# EAGLE board CT_schematic (EAGLE 7.6.0)

Size 100 x 80 mm. Coordinates in mm from the lower left corner, seen from the top.
Outline: 0,0 100,0 100,80 0,80 0,0
Copper layers (1*16): Top 0.035mm / dielectric 1.5mm / Bottom 0.035mm
Design rules "default": minimum track width 10mil, minimum drill 24mil, track to track 8mil, track to pad 8mil, pad to pad 8mil, via to via 8mil, smd to smd 8mil, copper to edge 40mil, drill to drill 8mil, minimum pad ring 10mil, minimum via ring 8mil, stop-mask expansion 4mil, vias tented up to drill 0mil, thermal gap 10mil

## Footprints (pad centres in the part's own frame; a part is rotated, then mirrored left to right if it is on the bottom)
C0603 = smd 0.8 x 0.8: 1 -0.762,0; 2 0.762,0
C0805 = smd 1.2 x 1.3: 1 -1.016,0; 2 1.016,0
C0402 = smd 0.5 x 0.5: 1 -0.508,0; 2 0.508,0
C1210 = smd 1.2 x 2.5: 1 -1.524,0; 2 1.524,0
R0603 = smd 0.8 x 0.8: 1 -0.762,0; 2 0.762,0
EXV-9H = smd 3.505 x 1.676: 1 -2.857,0; 2 2.857,0
L0603 = smd 0.8 x 0.8: 1 -0.762,0; 2 0.762,0
L1210 = smd 1.2 x 2.5: 1 -1.524,0; 2 1.524,0
IND25X25CZ = smd 2.489 x 3.429: 1 -2.718,0; 2 2.718,0
PJ-037B_PACKAGE = drill 3.7 square: 1 12,0 | drill 3.2 square: 2 6,0
LFBGA144 = smd 0.52 x 0.52: A1 -4.4,4.4; A2 -3.6,4.4; A3 -2.8,4.4; A4 -2,4.4; A5 -1.2,4.4; A6 -0.4,4.4; A7 0.4,4.4; A8 1.2,4.4; A9 2,4.4; A10 2.8,4.4; A11 3.6,4.4; A12 4.4,4.4; B1 -4.4,3.6; B2 -3.6,3.6; B3 -2.8,3.6; B4 -2,3.6; B5 -1.2,3.6; B6 -0.4,3.6; B7 0.4,3.6; B8 1.2,3.6; B9 2,3.6; B10 2.8,3.6; B11 3.6,3.6; B12 4.4,3.6; C1 -4.4,2.8; C2 -3.6,2.8; C3 -2.8,2.8; C4 -2,2.8; C5 -1.2,2.8; C6 -0.4,2.8; C7 0.4,2.8; C8 1.2,2.8; C9 2,2.8; C10 2.8,2.8; C11 3.6,2.8; C12 4.4,2.8; D1 -4.4,2; D2 -3.6,2; D3 -2.8,2; D4 -2,2; D5 -1.2,2; D6 -0.4,2; D7 0.4,2; D8 1.2,2; D9 2,2; D10 2.8,2; D11 3.6,2; D12 4.4,2; E1 -4.4,1.2; E2 -3.6,1.2; E3 -2.8,1.2; E4 -2,1.2; E5 -1.2,1.2; E6 -0.4,1.2; E7 0.4,1.2; E8 1.2,1.2; E9 2,1.2; E10 2.8,1.2; E11 3.6,1.2; E12 4.4,1.2; F1 -4.4,0.4; F2 -3.6,0.4; F3 -2.8,0.4; F4 -2,0.4; F5 -1.2,0.4; F6 -0.4,0.4; F7 0.4,0.4; F8 1.2,0.4; F9 2,0.4; F10 2.8,0.4; F11 3.6,0.4; F12 4.4,0.4; G1 -4.4,-0.4; G2 -3.6,-0.4; G3 -2.8,-0.4; G4 -2,-0.4; G5 -1.2,-0.4; G6 -0.4,-0.4; G7 0.4,-0.4; G8 1.2,-0.4; G9 2,-0.4; G10 2.8,-0.4; G11 3.6,-0.4; G12 4.4,-0.4; H1 -4.4,-1.2; H2 -3.6,-1.2; H3 -2.8,-1.2; H4 -2,-1.2; H5 -1.2,-1.2; H6 -0.4,-1.2; H7 0.4,-1.2; H8 1.2,-1.2; H9 2,-1.2; H10 2.8,-1.2; H11 3.6,-1.2; H12 4.4,-1.2; J1 -4.4,-2; J2 -3.6,-2; J3 -2.8,-2; J4 -2,-2; J5 -1.2,-2; J6 -0.4,-2; J7 0.4,-2; J8 1.2,-2; J9 2,-2; J10 2.8,-2; J11 3.6,-2; J12 4.4,-2; K1 -4.4,-2.8; K2 -3.6,-2.8; K3 -2.8,-2.8; K4 -2,-2.8; K5 -1.2,-2.8; K6 -0.4,-2.8; K7 0.4,-2.8; K8 1.2,-2.8; K9 2,-2.8; K10 2.8,-2.8; K11 3.6,-2.8; K12 4.4,-2.8; L1 -4.4,-3.6; L2 -3.6,-3.6; L3 -2.8,-3.6; L4 -2,-3.6; L5 -1.2,-3.6; L6 -0.4,-3.6; L7 0.4,-3.6; L8 1.2,-3.6; L9 2,-3.6; L10 2.8,-3.6; L11 3.6,-3.6; L12 4.4,-3.6; M1 -4.4,-4.4; M2 -3.6,-4.4; M3 -2.8,-4.4; M4 -2,-4.4; M5 -1.2,-4.4; M6 -0.4,-4.4; M7 0.4,-4.4; M8 1.2,-4.4; M9 2,-4.4; M10 2.8,-4.4; M11 3.6,-4.4; M12 4.4,-4.4
SSOP-20 = smd 1.651 x 0.432: 1 -3.48,2.925; 2 -3.48,2.275; 3 -3.48,1.625; 4 -3.48,0.975; 5 -3.48,0.325; 6 -3.48,-0.325; 7 -3.48,-0.975; 8 -3.48,-1.625; 9 -3.48,-2.275; 10 -3.48,-2.925; 11 3.48,-2.925; 12 3.48,-2.275; 13 3.48,-1.625; 14 3.48,-0.975; 15 3.48,-0.325; 16 3.48,0.325; 17 3.48,0.975; 18 3.48,1.625; 19 3.48,2.275; 20 3.48,2.925
HTSS-105-01-G-D = drill 1 pad 1.8 square: 1 0,0 | drill 1 pad 1.8: 2 0,2.54; 3 2.54,0; 4 2.54,2.54; 5 5.08,0; 6 5.08,2.54; 7 7.62,0; 8 7.62,2.54; 9 10.16,0; 10 10.16,2.54
VFBGA-63 = smd 0.4 x 0.4: A1 -3.6,4.4; A2 -2.8,4.4; A9 2.8,4.4; A10 3.6,4.4; B1 -3.6,3.6; B9 2.8,3.6; B10 3.6,3.6; C3 -2,2.8; C4 -1.2,2.8; C5 -0.4,2.8; C6 0.4,2.8; C7 1.2,2.8; C8 2,2.8; D3 -2,2; D4 -1.2,2; D5 -0.4,2; D6 0.4,2; D7 1.2,2; D8 2,2; E3 -2,1.2; E4 -1.2,1.2; E5 -0.4,1.2; E6 0.4,1.2; E7 1.2,1.2; E8 2,1.2; F3 -2,0.4; F4 -1.2,0.4; F5 -0.4,0.4; F6 0.4,0.4; F7 1.2,0.4; F8 2,0.4; G3 -2,-0.4; G4 -1.2,-0.4; G5 -0.4,-0.4; G6 0.4,-0.4; G7 1.2,-0.4; G8 2,-0.4; H3 -2,-1.2; H4 -1.2,-1.2; H5 -0.4,-1.2; H6 0.4,-1.2; H7 1.2,-1.2; H8 2,-1.2; J3 -2,-2; J4 -1.2,-2; J5 -0.4,-2; J6 0.4,-2; J7 1.2,-2; J8 2,-2; K3 -2,-2.8; K4 -1.2,-2.8; K5 -0.4,-2.8; K6 0.4,-2.8; K7 1.2,-2.8; K8 2,-2.8; L1 -3.6,-3.6; L2 -2.8,-3.6; L9 2.8,-3.6; L10 3.6,-3.6; M1 -3.6,-4.4; M2 -2.8,-4.4; M9 2.8,-4.4; M10 3.6,-4.4
SON-8 = smd 0.35 x 0.85: 1 -0.975,-1.475; 2 -0.325,-1.475; 3 0.325,-1.475; 4 0.975,-1.475; 5 0.975,1.475; 6 0.325,1.475; 7 -0.325,1.475; 8 -0.975,1.475 | smd 2.4 x 1.65: PAD 0,0
QFN-28 = smd 0.813 x 0.305: 1 -2.451,1.5; 2 -2.451,1; 3 -2.451,0.5; 4 -2.451,0; 5 -2.451,-0.5; 6 -2.451,-1; 7 -2.451,-1.5; 15 2.451,-1.5; 16 2.451,-1; 17 2.451,-0.5; 18 2.451,0; 19 2.451,0.5; 20 2.451,1; 21 2.451,1.5 | smd 0.305 x 0.813: 8 -1.5,-2.451; 9 -1,-2.451; 10 -0.5,-2.451; 11 0,-2.451; 12 0.5,-2.451; 13 1,-2.451; 14 1.5,-2.451; 22 1.5,2.451; 23 1,2.451; 24 0.5,2.451; 25 0,2.451; 26 -0.5,2.451; 27 -1,2.451; 28 -1.5,2.451 | smd 3.607 x 3.607: 29 0,0
SJ-43515TS-SMT-TR = smd 2.2 x 3: 1 0.6,-7.4; 4 3.4,-7.4 | smd 3 x 3: 2 12.8,-7.4; 5 17,-3 | smd 2 x 3: 3 5.3,0; 6 2.5,0 | drill 1.8: P$7 4.5,-3.69; P$8 11.54,-3.69
ABS07-32.768KHZ-7-T = smd 1.1 x 2.4: 1 -2.5,0; 2 0,0
ABLS-12.288MHZ-B4-T = smd 5.6 x 2.8: 1 -3.81,0; 2 5.69,0
ASEK = smd 1.4 x 1: 1 -1.1,-0.8; 2 1.1,-0.8; 3 1.1,0.8; 4 -1.1,0.8
ASFL1 = smd 1.7 x 1.5: 1 -1.27,-1.1; 2 1.27,-1.1; 3 1.27,1.1; 4 -1.27,1.1
IR3899MTR1PBF = smd 0.25 x 0.75: 1 0,0; 2 0.5,0; 3 1,0; 4 1.5,0; 5 2,0; 6 2.5,0; 7 3,0 | smd 0.75 x 0.25: 8 3.425,0.78; 9 3.425,1.28; 10 3.425,1.78; 14 -0.425,1.78; 15 -0.425,1.28; 16 -0.425,0.78 | smd 0.3 x 1.95: 11 3.22,3.63 | smd 1.62 x 2.42: 12 1.786,3.8 | smd 1 x 1.95: 13 0.117,3.63 | smd 2.19 x 1.25: 17 1.51,1.26
SON-6 = smd 0.55 x 0.3: 1 -0.355,0.5 | smd 0.52 x 0.3: 2 -0.37,0; 3 -0.37,-0.5; 4 0.37,-0.5; 5 0.37,0; 6 0.37,0.5
SW_4-1437565-2 = smd 1.4 x 2.1: 1 -2.23,4.55; 2 -2.23,-4.55; 3 2.23,4.55; 4 2.23,-4.55
LGM67K-G1J2-24-Z = smd 0.8 x 1.4: A -2,0; C 0,0
NC7SZ125M5X = smd 1.3 x 0.7: 1 -1.3,0.95; 2 -1.3,0; 3 -1.3,-0.95; 4 1.3,-0.95; 5 1.3,0.95

## Placement (x,y rotation side)
C1  1e-06  [C0603]  -22.86,77.47 0 top  (outside the outline)
C2  1e-07  [C0603]  -26.67,77.47 0 top  (outside the outline)
C3  1e-07  [C0603]  -30.48,77.47 0 top  (outside the outline)
C4  1e-07  [C0603]  -34.29,77.47 0 top  (outside the outline)
C5  1e-07  [C0603]  -38.1,77.47 0 top  (outside the outline)
C6  1e-07  [C0603]  -41.91,77.47 0 top  (outside the outline)
C7  1e-07  [C0603]  -45.72,77.47 0 top  (outside the outline)
C8  1e-07  [C0603]  -49.53,77.47 0 top  (outside the outline)
C9  1e-07  [C0603]  -53.34,77.47 0 top  (outside the outline)
C10  1e-07  [C0603]  -57.15,77.47 0 top  (outside the outline)
C11  1e-07  [C0603]  -60.96,77.47 0 top  (outside the outline)
C12  1e-07  [C0603]  -64.77,77.47 0 top  (outside the outline)
C13  1e-07  [C0603]  -68.58,77.47 0 top  (outside the outline)
C14  4.7e-06  [C0603]  -74.93,72.39 0 top  (outside the outline)
C15  1e-08  [C0603]  -72.39,77.47 0 top  (outside the outline)
C16  1e-08  [C0603]  -76.2,77.47 0 top  (outside the outline)
C17  1e-06  [C0603]  -80.01,77.47 0 top  (outside the outline)
C18  1e-06  [C0603]  -15.24,82.55 0 top  (outside the outline)
C19  1e-06  [C0603]  -19.05,82.55 0 top  (outside the outline)
C20  1e-06  [C0603]  -22.86,82.55 0 top  (outside the outline)
C21  4.7e-06  [C0805]  -50.8,60.96 0 top  (outside the outline)
C22  1e-07  [C0402]  -73.66,82.55 0 top  (outside the outline)
C23  1e-07  [C0402]  -77.47,82.55 0 top  (outside the outline)
C24  1e-07  [C0402]  -81.28,82.55 0 top  (outside the outline)
C25  1e-07  [C0402]  -15.24,87.63 0 top  (outside the outline)
C26  2.2e-06  [C0603]  -78.74,72.39 0 top  (outside the outline)
C27  1e-07  [C0402]  -19.05,87.63 0 top  (outside the outline)
C28  2.2e-05  [C1210]  -20.32,62.23 0 top  (outside the outline)
C29  2.2e-05  [C1210]  -26.67,62.23 0 top  (outside the outline)
C30  1e-09  [C0402]  -22.86,87.63 0 top  (outside the outline)
C31  1e-09  [C0402]  -26.67,87.63 0 top  (outside the outline)
C32  1e-07  [C0402]  -30.48,87.63 0 top  (outside the outline)
C33  1e-07  [C0402]  -34.29,87.63 0 top  (outside the outline)
C34  1e-07  [C0402]  -38.1,87.63 0 top  (outside the outline)
C35  1e-07  [C0402]  -41.91,87.63 0 top  (outside the outline)
C36  1e-07  [C0402]  -45.72,87.63 0 top  (outside the outline)
C37  1e-05  [C0805]  -55.88,60.96 0 top  (outside the outline)
C38  1e-05  [C0805]  -60.96,60.96 0 top  (outside the outline)
C39  1e-05  [C0805]  -66.04,60.96 0 top  (outside the outline)
C40  1e-05  [C0805]  -71.12,60.96 0 top  (outside the outline)
C41  1e-05  [C0805]  -76.2,60.96 0 top  (outside the outline)
C42  2.2e-11  [C0402]  -66.04,82.55 0 top  (outside the outline)
C43  2.2e-11  [C0402]  -69.85,82.55 0 top  (outside the outline)
C44  1e-08  [C0402]  -49.53,87.63 0 top  (outside the outline)
C45  1e-08  [C0402]  -53.34,87.63 0 top  (outside the outline)
C46  0.0001  [C1210]  -33.02,62.23 0 top  (outside the outline)
C47  2.2e-06  [C0603]  -15.24,77.47 0 top  (outside the outline)
C48  1e-07  [C0402]  -57.15,87.63 0 top  (outside the outline)
C49  1e-07  [C0402]  -60.96,87.63 0 top  (outside the outline)
C50  7.8444498006919e-09  [R0603]  -20.32,67.31 0 top  (outside the outline)
C51  2.7e-07  [C0603]  -19.05,77.47 0 top  (outside the outline)
C54  1e-07  [C0402]  -64.77,87.63 0 top  (outside the outline)
C55  0.0001  [EXV-9H]  -55.88,45.72 0 top  (outside the outline)
C56  0.0001  [EXV-9H]  -67.31,45.72 0 top  (outside the outline)
C57  1e-08  [C0402]  -68.58,87.63 0 top  (outside the outline)
F1  240.0  [L0603]  -26.67,82.55 0 top  (outside the outline)
I1  1.5e-05  [L1210]  -39.37,62.23 0 top  (outside the outline)
I2  6.8e-07  [IND25X25CZ]  -36.83,54.61 0 top  (outside the outline)
J1  PJ-037B  [PJ-037B_PACKAGE]  -55.88,21.59 0 top  (outside the outline)
R2  1000.0  [R0603]  -30.48,82.55 0 top  (outside the outline)
R4  4700.0  [R0603]  -34.29,82.55 0 top  (outside the outline)
R5  2200.0  [R0603]  -38.1,82.55 0 top  (outside the outline)
R6  2200.0  [R0603]  -41.91,82.55 0 top  (outside the outline)
R7  10000.0  [R0603]  -73.66,67.31 0 top  (outside the outline)
R8  100000.0  [R0603]  -48.26,67.31 0 top  (outside the outline)
R9  100000.0  [R0603]  -53.34,67.31 0 top  (outside the outline)
R10  100000.0  [R0603]  -58.42,67.31 0 top  (outside the outline)
R11  10000.0  [R0603]  -78.74,67.31 0 top  (outside the outline)
R12  10000.0  [R0603]  -15.24,72.39 0 top  (outside the outline)
R13  10000.0  [R0603]  -20.32,72.39 0 top  (outside the outline)
R14  10000.0  [R0603]  -25.4,72.39 0 top  (outside the outline)
R15  10000.0  [R0603]  -30.48,72.39 0 top  (outside the outline)
R16  10000.0  [R0603]  -35.56,72.39 0 top  (outside the outline)
R17  47000.0  [R0603]  -40.64,72.39 0 top  (outside the outline)
R18  47000.0  [R0603]  -45.72,72.39 0 top  (outside the outline)
R19  47000.0  [R0603]  -50.8,72.39 0 top  (outside the outline)
R20  680.0  [R0603]  -45.72,82.55 0 top  (outside the outline)
R21  0.1  [R0603]  -49.53,82.55 0 top  (outside the outline)
R22  4030.2416170974  [R0603]  -27.94,67.31 0 top  (outside the outline)
R23  719.68600305311  [R0603]  -35.56,67.31 0 top  (outside the outline)
R24  64.984347826087  [R0603]  -43.18,67.31 0 top  (outside the outline)
R25  130.0  [R0603]  -53.34,82.55 0 top  (outside the outline)
R26  39000.0  [R0603]  -55.88,72.39 0 top  (outside the outline)
R27  49900.0  [R0603]  -60.96,72.39 0 top  (outside the outline)
R28  5600.0  [R0603]  -57.15,82.55 0 top  (outside the outline)
R29  10000.0  [R0603]  -66.04,72.39 0 top  (outside the outline)
R30  10000.0  [R0603]  -71.12,72.39 0 top  (outside the outline)
R31  9100.0  [R0603]  -60.96,82.55 0 top  (outside the outline)
R32  680000.0  [R0603]  -63.5,67.31 0 top  (outside the outline)
R33  120000.0  [R0603]  -68.58,67.31 0 top  (outside the outline)
U1  stm32f103zgh7  [LFBGA144]  -22.86,7.62 0 top  (outside the outline)
U2  MAX3218EAP+T  [SSOP-20]  -71.12,33.02 0 top  (outside the outline)
U3  HTSS-105-01-G-D  [HTSS-105-01-G-D]  -62.23,33.02 0 top  (outside the outline)
U4  mt29f4g08abadah4  [VFBGA-63]  -62.23,21.59 0 top  (outside the outline)
U5  PCF85063TP/1Z  [SON-8]  -15.24,60.96 0 top  (outside the outline)
U6  WM8731CLSEFL  [QFN-28]  -77.47,53.34 0 top  (outside the outline)
U7  SJ-43515TS-SMT-TR  [SJ-43515TS-SMT-TR]  -54.61,10.16 0 top  (outside the outline)
U8  SJ-43515TS-SMT-TR  [SJ-43515TS-SMT-TR]  -39.37,24.13 0 top  (outside the outline)
U9  ABS07-32.768KHZ-7-T  [ABS07-32.768KHZ-7-T]  -55.88,54.61 0 top  (outside the outline)
U10  ABLS-12.288MHZ-B4-T  [ABLS-12.288MHZ-B4-T]  -25.4,54.61 0 top  (outside the outline)
U11  ASEK-32.768KHz-ECST  [ASEK]  -46.99,45.72 0 top  (outside the outline)
U12  ASFL1-25MHZ-NCS  [ASFL1]  -26.67,45.72 0 top  (outside the outline)
U13  IR3899MTR1PBF  [IR3899MTR1PBF]  -44.45,31.75 0 top  (outside the outline)
U14  TPS3895ADRYR  [SON-6]  -71.12,86.36 0 top  (outside the outline)
U15  4-1437565-2  [SW_4-1437565-2]  -27.94,35.56 0 top  (outside the outline)
U16  Q65110A2395  [LGM67K-G1J2-24-Z]  -64.77,53.34 0 top  (outside the outline)
U17  nc7sz125m5x  [NC7SZ125M5X]  -44.45,60.96 0 top  (outside the outline)

## Library data of the parts
C1-C51 C54-C57 F1 I1 I2 J1 R2 R4-R33 U1-U17 = circuit_tree

## Nets
CLK_CRYSTAL_U5_1: U5.1 U9.1
CLK_CRYSTAL_U5_2: U5.2 U9.2
CLK_CRYSTAL_U6_1: C42.1 U6.1 U10.1
CLK_CRYSTAL_U6_2: C43.1 U6.2 U10.2
CLK_U1_B1: U1.B1 U11.3
CLK_U1_D1: U1.D1 U12.3
GND: C1.2 C2.2 C3.2 C4.2 C5.2 C6.2 C7.2 C8.2 C9.2 C10.2 C11.2 C12.2 C13.2 C14.2 C15.2 C16.2 C17.2 C18.2 C19.2 C20.2 C22.2 C23.2 C24.2 C25.2 C26.2 C27.2 C31.2 C32.2 C33.2 C34.2 C35.2 C36.2 C37.2 C38.2 C39.2 C40.2 C41.2 C42.2 C43.2 C44.2 C45.2 C47.2 C48.2 C49.2 C54.2 C55.2 C56.2 C57.2 J1.2 R2.2 R7.2 R17.2 R18.2 R19.2 R21.1 R21.2 R23.2 R26.2 R28.2 R31.2 R33.2 U1.D2 U1.E5 U1.E6 U1.E7 U1.G4 U1.G8 U1.G9 U1.G10 U1.H5 U1.H6 U1.H7 U1.J1 U1.K1 U2.5 U2.17 U2.20 U3.9 U4.C5 U4.F7 U4.K3 U4.K8 U5.4 U5.PAD U6.4 U6.15 U6.19 U6.25 U6.26 U6.29 U7.1 U8.1 U11.2 U12.2 U13.4 U13.11 U13.17 U14.2 U16.C U17.1 U17.3
NET_U1_B5: R6.1 U1.B5 U5.5
NET_U1_C5: R5.1 U1.C5 U5.6
NET_U1_D5: R7.1 U1.D5
NET_U1_F1: R4.1 U1.F1 U17.4
NET_U1_M1: C15.1 C16.1 C17.1 F1.1 U1.L1 U1.M1
NET_U1_M9: U16.A
NET_U1_M10: U15.3 U15.4
NET_U2_1: I1.1 U2.1
NET_U2_2: R8.1 U2.2
NET_U2_3: R9.1 U2.3
NET_U2_4: R10.1 U2.4
NET_U2_15: C20.1 U2.15
NET_U2_16: C21.2 U2.16
NET_U2_18: C21.1 U2.18
NET_U2_19: C19.1 U2.19
NET_U3_3: U2.12 U3.3
NET_U3_4: U2.11 U3.4
NET_U3_5: U2.14 U3.5
NET_U3_6: U2.13 U3.6
NET_U4_C3: R15.1 U4.C3
NET_U4_C8: R11.1 U4.C8
NET_U5_3: R16.1 U5.3
NET_U6_9: U6.9
NET_U6_20: C36.1 C41.1 U6.20
NET_U7_2: C29.1 R18.1 U7.2
NET_U7_5: C28.1 R17.1 U7.5
NET_U7_13: C28.2
NET_U7_14: C29.2
NET_U8_5: C30.1 C31.1 R19.1 R20.1 U8.5
NET_U8_21: R20.2
NET_U8_22: C30.2
NET_U13_1: C50.1 R22.1 R23.1 R24.1 R25.1 U13.1 U13.8
NET_U13_2: C49.1 U13.2
NET_U13_3: C50.2 C51.1 C51.2 U13.3
NET_U13_5: R26.1 U13.5
NET_U13_10: C47.1 U13.10
NET_U13_12: C46.1 I2.1 U13.12
NET_U13_13: U13.13
NET_U13_14: C46.2 U13.14
NET_U13_15: R27.1 R28.1 U13.15
NET_U13_ATNET_3: I2.2 R22.2
NET_U13_ATNET_4: C51.2 R24.2
NET_U13_ATNET_5: R25.2
NET_U14_1: R30.1 R31.1 U14.1
NET_U14_3: R32.2 R33.1 U14.3
NET_U14_4: R29.1 U14.4 U17.2
NET_U15_1: R2.1 U15.1 U15.2
PROC_FSMC_D0: U1.K11 U4.H4
PROC_FSMC_D1: U1.K12 U4.J4
PROC_FSMC_D2: U1.E10 U4.K4
PROC_FSMC_D3: U1.D10 U4.K5
PROC_FSMC_D4: U1.M7 U4.K6
PROC_FSMC_D5: U1.L7 U4.J7
PROC_FSMC_D6: U1.K7 U4.K7
PROC_FSMC_D7: U1.J7 U4.J8
PROC_FSMC_NCE2: R12.1 U1.A9 U4.C6
PROC_FSMC_NOE: R14.1 U1.C9 U4.D4
PROC_FSMC_NWE: R13.1 U1.B9 U4.C7
PROC_I2S2_CK: U1.M12 U6.7
PROC_I2S2_SD: U1.L12 U6.8
PROC_I2S2_WS: U1.M11 U6.9 U6.11
PROC_UART4_RX: U1.B10 U2.9
PROC_UART4_TX: U1.B11 U2.7
VCC_S1_16V1: C48.1 C55.1 C56.1 J1.1 R27.2 U13.9
VCC_TIER1_3V3: C1.1 C2.1 C3.1 C4.1 C5.1 C6.1 C7.1 C8.1 C9.1 C10.1 C11.1 C12.1 C13.1 C14.1 C18.1 C22.1 C23.1 C24.1 C25.1 C26.1 C27.1 C32.1 C33.1 C34.1 C35.1 C37.1 C38.1 C39.1 C40.1 C44.1 C45.1 C54.1 C57.1 F1.2 I1.2 I2.2 R4.2 R5.2 R6.2 R8.2 R9.2 R10.2 R11.2 R12.2 R13.2 R14.2 R15.2 R16.2 R22.2 R29.2 R30.2 R32.1 U1.C2 U1.D3 U1.F4 U1.F5 U1.F6 U1.F7 U1.F8 U1.F9 U1.F10 U1.G5 U1.G6 U1.G7 U2.6 U4.D3 U4.G4 U4.H8 U4.J6 U5.8 U6.3 U6.5 U6.12 U6.18 U11.4 U12.4 U14.6 U17.5

## Tracks (layer width: path | path; a pad name or v marks a point on that pad's centre or on a via)
CLK_CRYSTAL_U5_1  (1 unrouted)
CLK_CRYSTAL_U5_2  (1 unrouted)
CLK_CRYSTAL_U6_1  (2 unrouted)
CLK_CRYSTAL_U6_2  (2 unrouted)
CLK_U1_B1  (1 unrouted)
CLK_U1_D1  (1 unrouted)
GND  (100 unrouted)
NET_U1_B5  (2 unrouted)
NET_U1_C5  (2 unrouted)
NET_U1_D5  (1 unrouted)
NET_U1_F1  (2 unrouted)
NET_U1_M1  (5 unrouted)
NET_U1_M10  (1 unrouted)
NET_U2_1  (1 unrouted)
NET_U2_2  (1 unrouted)
NET_U2_3  (1 unrouted)
NET_U2_4  (1 unrouted)
NET_U2_15  (1 unrouted)
NET_U2_16  (1 unrouted)
NET_U2_18  (1 unrouted)
NET_U2_19  (1 unrouted)
NET_U3_3  (1 unrouted)
NET_U3_4  (1 unrouted)
NET_U3_5  (1 unrouted)
NET_U3_6  (1 unrouted)
NET_U4_C3  (1 unrouted)
NET_U4_C8  (1 unrouted)
NET_U5_3  (1 unrouted)
NET_U6_20  (2 unrouted)
NET_U7_2  (2 unrouted)
NET_U7_5  (2 unrouted)
NET_U8_5  (4 unrouted)
NET_U13_1  (6 unrouted)
NET_U13_2  (1 unrouted)
NET_U13_3  (3 unrouted)
NET_U13_5  (1 unrouted)
NET_U13_10  (1 unrouted)
NET_U13_12  (2 unrouted)
NET_U13_14  (1 unrouted)
NET_U13_15  (2 unrouted)
NET_U13_ATNET_3  (1 unrouted)
NET_U13_ATNET_4  (1 unrouted)
NET_U14_1  (2 unrouted)
NET_U14_3  (2 unrouted)
NET_U14_4  (2 unrouted)
NET_U15_1  (2 unrouted)
PROC_FSMC_D0  (1 unrouted)
PROC_FSMC_D1  (1 unrouted)
PROC_FSMC_D2  (1 unrouted)
PROC_FSMC_D3  (1 unrouted)
PROC_FSMC_D4  (1 unrouted)
PROC_FSMC_D5  (1 unrouted)
PROC_FSMC_D6  (1 unrouted)
PROC_FSMC_D7  (1 unrouted)
PROC_FSMC_NCE2  (2 unrouted)
PROC_FSMC_NOE  (2 unrouted)
PROC_FSMC_NWE  (2 unrouted)
PROC_I2S2_CK  (1 unrouted)
PROC_I2S2_SD  (1 unrouted)
PROC_I2S2_WS  (2 unrouted)
PROC_UART4_RX  (1 unrouted)
PROC_UART4_TX  (1 unrouted)
VCC_S1_16V1  (5 unrouted)
VCC_TIER1_3V3  (77 unrouted)